# Altium PCB bms_companion-1_0.PcbDoc (part 1 of 2)
Units mm, origin at the board's own origin, x right, y up, seen from the top; angles counter-clockwise.
Board outline 368 x 57.35 mm, 4 copper layers (L1, L2, L3, L4), stack 1.586 mm thick; 222 components, 124 nets, 523 pads, 134 vias.
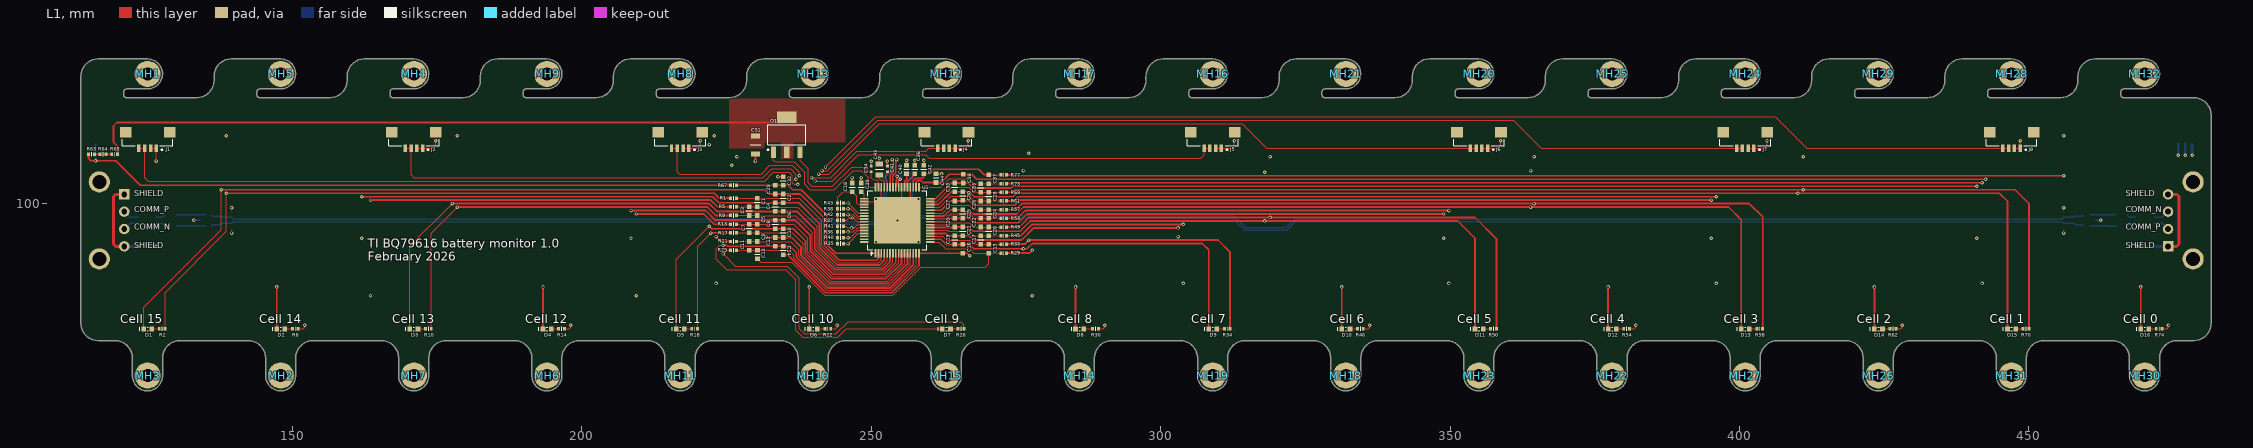
[diagram p0: L1 view]
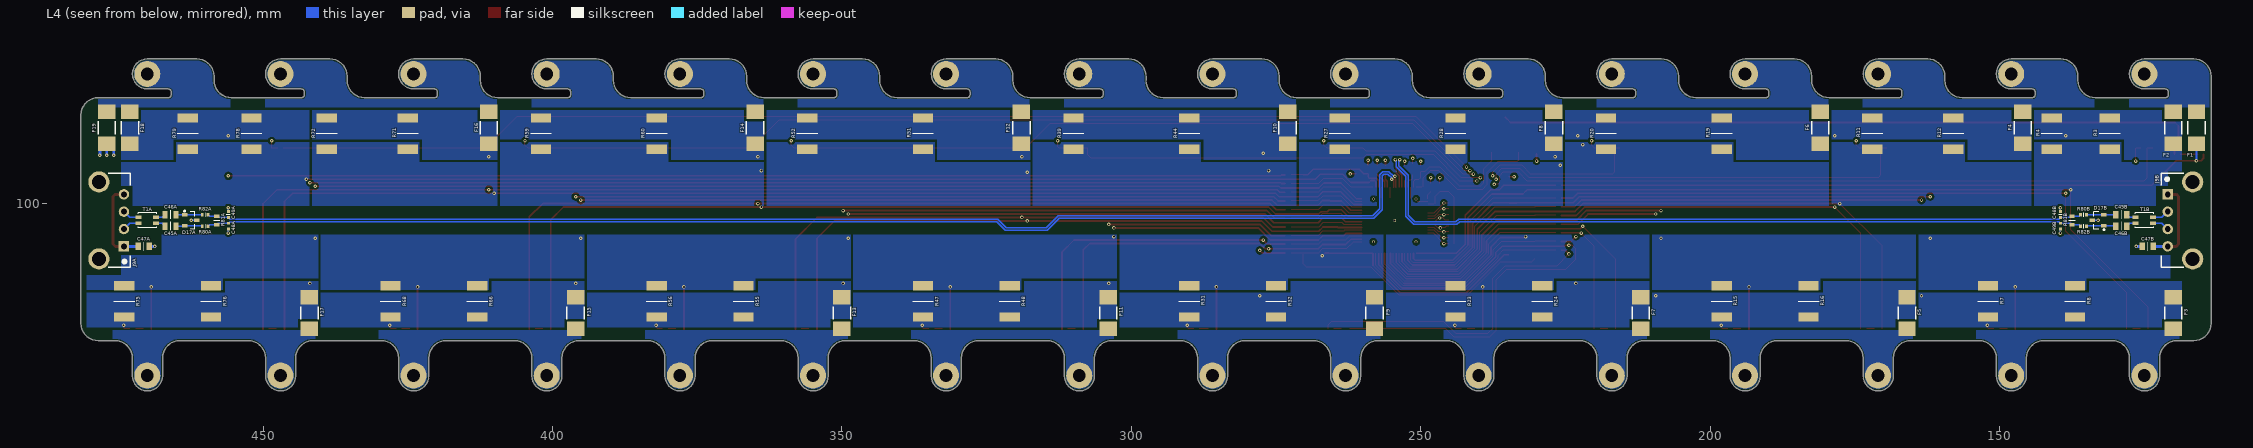
[diagram p1: L4 view, seen from below]
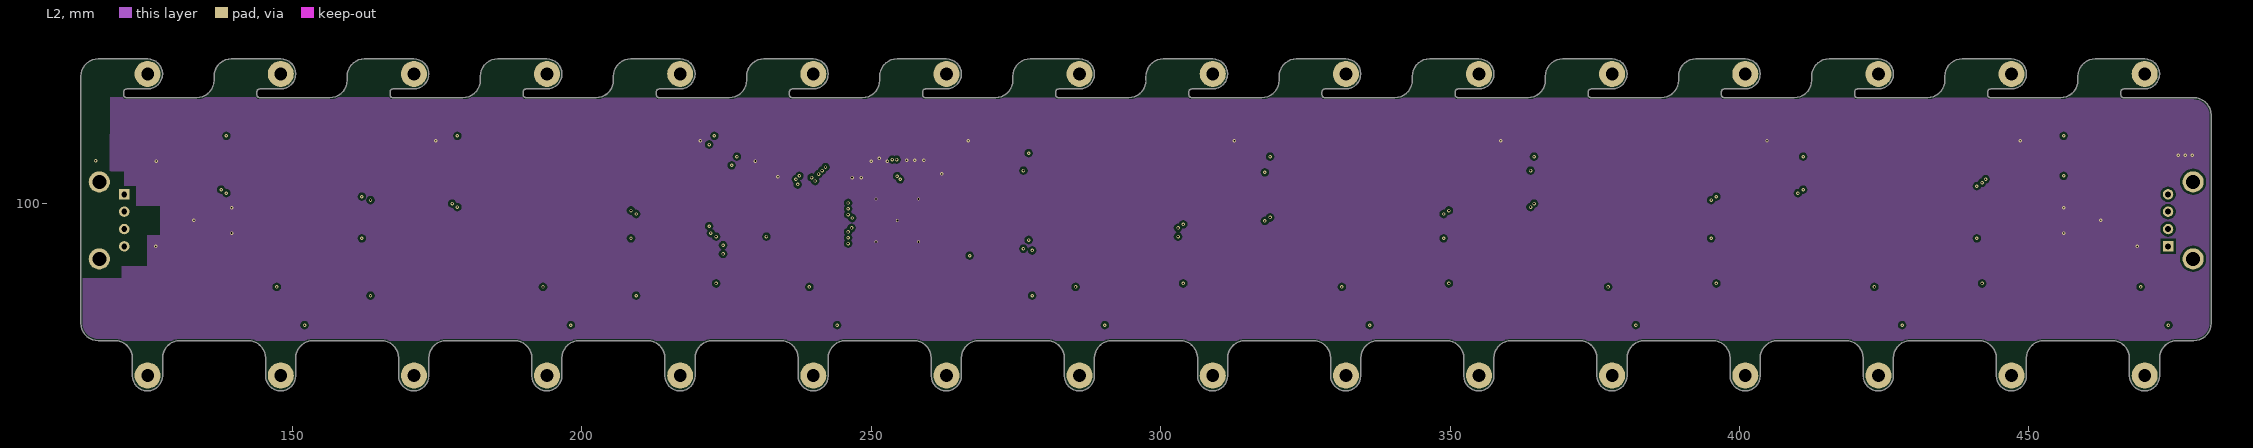
[diagram p2: L2]
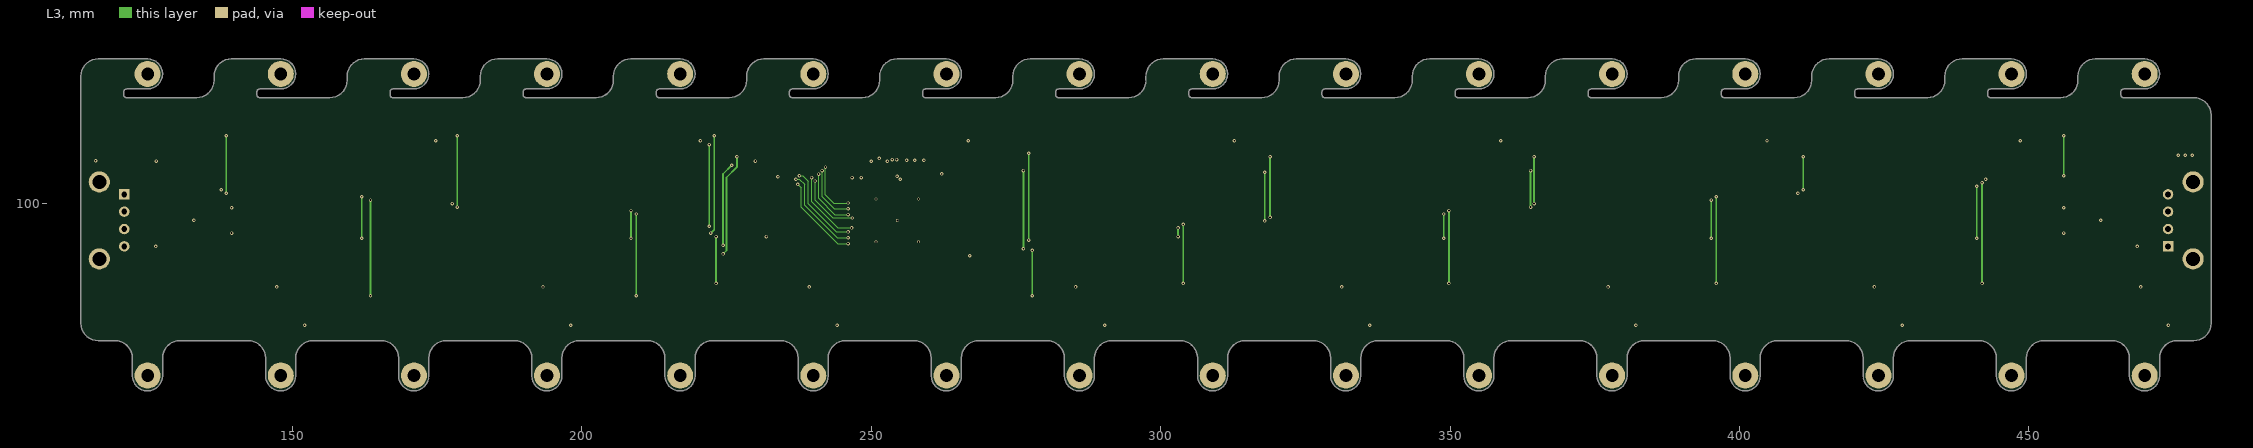
[diagram p3: L3]

## Layer stack, top to bottom
Top Solder: solder mask 0.0102, Solder Resist, Dk 3.5
L1: signal copper 0.035
D1: prepreg 0.2104, PP-006, Dk 4.1
L2: signal copper 0.0152
D2: dielectric 1.065, FR-4, Dk 4.8
L3: signal copper 0.0152
D3: prepreg 0.2104, PP-006, Dk 4.1
L4: signal copper 0.035
Bottom Solder: solder mask 0.0102, Solder Resist, Dk 3.5

## Board outline
1493 vertices, not listed, extent 113.469,67.545 481.469,124.895

## Design rules (kind name [scope] priority, off if disabled: settings)
AcuteAngle [All] p1: minimum=8.00000000000000E+0001 checktracksonly=FALSE
BoardOutlineClearance [All] p1: gap=0.3 ignorepadtopadclearanceinfootprint=FALSE except(0: Arc-SplitContinuation Track-SplitContinuation SMDPad-SplitContinuation THPad-SplitContinuation Via-SplitContinuation Fill-SplitContinuation Poly-SplitContinuation Region-SplitContinuation Text-SplitContinuation)
Clearance [All] p1: gap=0.15 ignorepadtopadclearanceinfootprint=FALSE except(0.4: Arc-Fill Arc-Poly Arc-Region Track-Fill Track-Poly Track-Region SMDPad-Fill SMDPad-Poly SMDPad-Region THPad-Fill THPad-Poly THPad-Region Via-Fill Via-Poly Via-Region Fill-Fill Fill-Poly Fill-Region Poly-Poly Poly-Region Region-Region)
DiffPairsRouting DE_100 [InDifferentialPairClass('DE_100')] p1: maxlimit=0.2 minlimit=0.2 mostfreqgap=0.2 toplayer_minwidth=0.218 toplayer_maxwidth=0.218 toplayer_prefwidth=0.218 midlayer1_minwidth=0.218 midlayer1_maxwidth=0.218 midlayer1_prefwidth=0.218 midlayer2_minwidth=0.218 midlayer2_maxwidth=0.218 midlayer2_prefwidth=0.218 bottomlayer_minwidth=0.218 bottomlayer_maxwidth=0.218 bottomlayer_prefwidth=0.218 maxuncoupledlength=12.7
HoleSize [All] p1: absolutevalues=TRUE maxlimit=64 minlimit=0.3 maxpercent=80.000 minpercent=20.000
MinimumAnnularRing [All] p1: minimumring=0.125
MinimumSolderMaskSliver [All] p1: minsoldermaskwidth=0.05
PlaneClearance [All] p1: clearance=0.4
PlaneConnect [All] p1: pad.planeconnectstyle=Relief pad.reliefexpansion=0.508 pad.reliefentries=4 pad.reliefconductorwidth=0.254 pad.reliefairgap=0.254 via.planeconnectstyle=Direct via.reliefexpansion=0.508 via.reliefentries=4 via.reliefconductorwidth=0.254 via.reliefairgap=0.254
PolygonConnect PolygonConnect_MH [HasFootprint('HOLE_M2')] p1: connectstyle=Direct reliefconductorwidth=0.254 reliefentries=4 polygonreliefangle="90 Angle" airgapwidth=0.254
PolygonConnect [All] p2: thpad.connectstyle=Relief thpad.reliefconductorwidth=0.254 thpad.reliefentries=4 thpad.polygonreliefangle="90 Angle" thpad.airgapwidth=0.254 smdpad.connectstyle=Direct smdpad.reliefconductorwidth=0.254 smdpad.reliefentries=4 smdpad.polygonreliefangle="90 Angle" smdpad.airgapwidth=0.254 via.connectstyle=Direct via.reliefconductorwidth=0.254 via.reliefentries=4 via.polygonreliefangle="90 Angle" via.airgapwidth=0.254
RoutingVias [All] p1: holewidth=0.3 width=0.6 viastyle="Through Hole" minholewidth=0.3 minwidth=0.6 maxholewidth=25 maxwidth=25 viatemplateguid#1={3B8295E5-CAAF-4C18-935D-10A9A8B2B12F} viatemplateguid#2={ACBB2F03-A6D7-4ED9-AAE5-3FD5D15C8CEC} viatemplatename#1=v50h35 viatemplatename#2=v65h30
SilkToSilkClearance [All] p1: silktosilkclearance=0.05
SilkToSolderMaskClearance [IsPad] p1: minsilkscreentomaskgap=0.005 clearancetoexposedcopper=FALSE
SolderMaskExpansion Vias [IsVia] p1: expansion=0.1 istentingtop=FALSE soldermaskfromhole=TRUE
SolderMaskExpansion [All] p2: expansion=0.102 istentingtop=FALSE
SupplyNets "Schematic Supply Nets_1" [InNet('GND')] p1: voltage=0.000
Width [All] p1: maxlimit=50 minlimit=0.15 preferedwidth=0.2
23 further rules are at their usual default settings.

## Classes and differential pairs
differential pair class DE_100: COMH. COML. COMMA COMMB
channel class comm_connector: conn_down conn_up
component class conn_up: C45B C46B C47B C48B C49B D17B J9B R80B R81B R82B T1B
component class conn_down: C45A C46A C47A C48A C49A D17A J9A R80A R81A R82A T1A
component class top: C1 C2 C3 C4 C5 C6 C7 C8 C9 C10 C11 C12 C13 C14 C15 C16 C17 C18 C19 C20 C21 C22 C23 C24 C25 C26 C27 C28 C29 C30 C31 C32 C33 C34 C35 C36 C37 C38 C39 C40 C41 C42 C43 C44 D1 D2 D3 D4 D5 D6 D7 D8 D9 D10 D11 D12 D13 D14 D15 D16 F1 F2 F3 F4 F5 F6 F7 F8 F9 F10 F11 F12 F13 F14 F15 F16 F17 F18 F19 J1 J2 J3 J4 J5 J6 J7 J8 MH1 MH2 MH3 MH4 MH5 MH6 MH7 MH8 MH9 MH10 MH11 MH12 MH13 MH14 MH15 MH16 MH17 MH18 MH19 MH20 MH21 MH22 MH23 MH24 MH25 MH26 MH27 MH28 MH29 MH30 MH31 MH32 Q1 R1 R2 R3 R4 R5 R6 R7 R8 R9 R10 R11 R12 R13 R14 R15 R16 R17 R18 R19 R20 R21 R22 R23 R24 R25 R26 R27 R28 R29 R30 R31 R32 R33 R34 R35 R36 R37 R38 R39 R40 R41 R42 R43 R44 R45 R46 R47 R48 R49 R50 R51 R52 R53 R54 R55 R56 R57 R58 R59 R60 R61 R62 R63 R64 R65 R66 R67 R68 R69 R70 R71 R72 R73 R74 R75 R76 R77 R78 R79 U1
differential pair COMMB: +COMMB_P -COMMB_N
differential pair COMMA: +COMMA_P -COMMA_N
differential pair COML.: +COML._P -COML._N
differential pair COMH.: +COMH._P -COMH._N

## Components (designator, comment, footprint, x,y, rotation, side; value= is the part's Value field where it differs from the comment)
C1 "CGJ3E3X7R1E474K080AB" C0603_0.80MM 230.3,100.1 r270 top
C2 "CGJ3E3X7R1E474K080AB" C0603_0.80MM 234.8,100.8 r270 top
C3 "CGJ3E3X7R1E474K080AB" C0603_0.80MM 228.9,98.6 r270 top
C4 "CGJ3E3X7R1E474K080AB" C0603_0.80MM 233.4,99.3 r270 top
C5 "CGJ3E3X7R1E474K080AB" C0603_0.80MM 230.3,97.1 r270 top
C6 "CGJ3E3X7R1E474K080AB" C0603_0.80MM 234.8,97.8 r270 top
C7 "CGJ3E3X7R1E474K080AB" C0603_0.80MM 228.9,95.6 r270 top
C8 "CGJ3E3X7R1E474K080AB" C0603_0.80MM 233.4,96.3 r270 top
C9 "CGJ3E3X7R1E474K080AB" C0603_0.80MM 230.3,94.1 r270 top
C10 "CGJ3E3X7R1E474K080AB" C0603_0.80MM 234.8,94.8 r270 top
C11 "CGJ3E3X7R1E474K080AB" C0603_0.80MM 228.9,92.6 r270 top
C12 "CGJ3E3X7R1E474K080AB" C0603_0.80MM 233.4,93.3 r270 top
C13 "CGJ3E3X7R1E474K080AB" C0603_0.80MM 230.35,91.1 r270 top
C14 "CGJ3E3X7R1E474K080AB" C0603_0.80MM 234.8,91.8 r270 top
C15 "CGJ3E3X7R1E474K080AB" C0603_0.80MM 270.3,92.1 r90 top
C16 "CGJ3E3X7R1E474K080AB" C0603_0.80MM 265.8,92.1 r90 top
C17 "CGJ3E3X7R1E474K080AB" C0603_0.80MM 268.9,93.6 r90 top
C18 "CGJ3E1X7R1E105K080AC" C0603_0.80MM 246.7,102.7 r90 top
C19 "CGJ3E3X7R1E474K080AB" C0603_0.80MM 264.4,93.6 r90 top
C20 "CGJ3E3X7R1E474K080AB" C0603_0.80MM 270.3,95.1 r90 top
C21 "CGJ3E3X7R1E474K080AB" C0603_0.80MM 265.8,95.1 r90 top
C22 "CGJ3E3X7R1E474K080AB" C0603_0.80MM 268.9,96.6 r90 top
C23 "CGJ3E3X7R1E474K080AB" C0603_0.80MM 264.4,96.6 r90 top
C24 "CGJ3E3X7R1E474K080AB" C0603_0.80MM 270.3,98.1 r90 top
C25 "CGJ3E3X7R1E474K080AB" C0603_0.80MM 265.8,98.1 r90 top
C26 "CGJ3E3X7R1E474K080AB" C0603_0.80MM 268.9,99.6 r90 top
C27 "CGJ3E3X7R1E474K080AB" C0603_0.80MM 264.4,99.6 r90 top
C28 "CGJ3E3X7R1E474K080AB" C0603_0.80MM 270.3,101.1 r90 top
C29 "CGJ3E3X7R1E474K080AB" C0603_0.80MM 233.4,102.3 r90 top
C30 "CGJ3E3X7R1E474K080AB" C0603_0.80MM 265.8,101.2 r90 top
C31 "CGA5H2X7R2A224M115AA" C1206_1.30MM 230,110 r270 top
C32 "CGJ3E2X7R2A103K080AA" C0603_0.80MM 234.8,103.8 r90 top
C33 "CGJ3E3X7R1E474K080AB" C0603_0.80MM 268.9,102.6 r90 top
C34 "CGA2B3X7R1H104M050BB" C0402_0.55MM 250,105.9 r90 top
C35 "CGJ3E3X7R1E474K080AB" C0603_0.80MM 264.4,102.7 r90 top
C36 "CGJ3E1X7R1E105K080AC" C0603_0.80MM 257.5,105.8 r90 top
C37 "CGJ3E3X7R1E474K080AB" C0603_0.80MM 270.3,104.1 r90 top
C38 "CGJ3E3X7R1E474K080AB" C0603_0.80MM 265.9,104.2 r90 top
C39 "CGJ3E1X7R1E105K080AC" C0603_0.80MM 248.3,102.7 r90 top
C40 "CGJ3E1X7R1E105K080AC" C0603_0.80MM 256.1,105.8 r90 top
C41 "CGA2B3X7R1H104M050BB" C0402_0.55MM 252.8,105.9 r90 top
C42 "CGJ3E3X7R1E474K080AB" C0603_0.80MM 259.1,105.8 r90 top
C43 "CGA4J3X7R1C475K125AB" C0805_1.45MM 251.4,105.8 r90 top
C44 "CGJ3E3X7R1E474K080AB" C0603_0.80MM 261.2,104.3 r90 top
C45A "CGA4J3C0G2E222J125AA" C0805_1.45MM 466,96 r0 bottom (schematic designator C45)
C45B "CGA4J3C0G2E222J125AA" C0805_1.45MM 129,98 r180 bottom (schematic designator C45)
C46A "CGA4J3C0G2E222J125AA" C0805_1.45MM 466,98 r0 bottom (schematic designator C46)
C46B "CGA4J3C0G2E222J125AA" C0805_1.45MM 129,96 r180 bottom (schematic designator C46)
C47A "CGA4J3X7R2E103K125AA" C0805_1.45MM 470.6,92.5 r180 bottom (schematic designator C47)
C47B "CGA4J3X7R2E103K125AA" C0805_1.45MM 124.4,92.5 r0 bottom (schematic designator C47)
C48A "CGA2B2C0G1H221J050BA" C0402_0.55MM 456,96 r270 bottom (schematic designator C48)
C48B "CGA2B2C0G1H221J050BA" C0402_0.55MM 139.5,98 r90 bottom (schematic designator C48)
C49A "CGA2B2C0G1H221J050BA" C0402_0.55MM 456,98 r90 bottom (schematic designator C49)
C49B "CGA2B2C0G1H221J050BA" C0402_0.55MM 139.5,96 r270 bottom (schematic designator C49)
D1 "LTST-C190KRKT" LED_0603P_RED 125,78.25 r0 top
D2 "LTST-C190KRKT" LED_0603P_RED 148,78.25 r0 top
D3 "LTST-C190KRKT" LED_0603P_RED 171,78.25 r0 top
D4 "LTST-C190KRKT" LED_0603P_RED 194,78.25 r0 top
D5 "LTST-C190KRKT" LED_0603P_RED 217,78.25 r0 top
D6 "LTST-C190KRKT" LED_0603P_RED 240,78.25 r0 top
D7 "LTST-C190KRKT" LED_0603P_RED 263,78.25 r0 top
D8 "LTST-C190KRKT" LED_0603P_RED 286,78.25 r0 top
D9 "LTST-C190KRKT" LED_0603P_RED 309,78.25 r0 top
D10 "LTST-C190KRKT" LED_0603P_RED 332,78.25 r0 top
D11 "LTST-C190KRKT" LED_0603P_RED 355,78.25 r0 top
D12 "LTST-C190KRKT" LED_0603P_RED 378,78.25 r0 top
D13 "LTST-C190KRKT" LED_0603P_RED 401,78.25 r0 top
D14 "LTST-C190KRKT" LED_0603P_RED 424,78.25 r0 top
D15 "LTST-C190KRKT" LED_0603P_RED 447,78.25 r0 top
D16 "LTST-C190KRKT" LED_0603P_RED 470,78.25 r0 top
D17A "PESD2USB3UX" 3SOT23 462.5,97 r180 bottom (schematic designator D17)
D17B "PESD2USB3UX" 3SOT23 133,97 r0 bottom (schematic designator D17)
F1 "JFC2410-0500TS" JDTFUSE_JFC2410 116,113 r270 bottom
F2 "JFC2410-0500TS" JDTFUSE_JFC2410 120,113 r270 bottom
F3 "JFC2410-0500TS" JDTFUSE_JFC2410 120,81 r90 bottom
F4 "JFC2410-0500TS" JDTFUSE_JFC2410 146,113 r270 bottom
F5 "JFC2410-0500TS" JDTFUSE_JFC2410 166,81 r90 bottom
F6 "JFC2410-0500TS" JDTFUSE_JFC2410 181,113 r270 bottom
F7 "JFC2410-0500TS" JDTFUSE_JFC2410 212,81 r90 bottom
F8 "JFC2410-0500TS" JDTFUSE_JFC2410 227,113 r270 bottom
F9 "JFC2410-0500TS" JDTFUSE_JFC2410 258,81 r90 bottom
F10 "JFC2410-0500TS" JDTFUSE_JFC2410 273,113 r270 bottom
F11 "JFC2410-0500TS" JDTFUSE_JFC2410 304,81 r90 bottom
F12 "JFC2410-0500TS" JDTFUSE_JFC2410 319,113 r270 bottom
F13 "JFC2410-0500TS" JDTFUSE_JFC2410 350,81 r90 bottom
F14 "JFC2410-0500TS" JDTFUSE_JFC2410 365,113 r270 bottom
F15 "JFC2410-0500TS" JDTFUSE_JFC2410 396,81 r90 bottom
F16 "JFC2410-0500TS" JDTFUSE_JFC2410 411,113 r270 bottom
F17 "JFC2410-0500TS" JDTFUSE_JFC2410 442,81 r90 bottom
F18 "JFC2410-0500TS" JDTFUSE_JFC2410 473,113 r270 bottom
F19 "JFC2410-0500TS" JDTFUSE_JFC2410 477,113 r270 bottom
J1 "686104148922" WURTH_WR-FPC_1.00mm_686104148922 125,112.8 r180 top locked
J2 "686104148922" WURTH_WR-FPC_1.00mm_686104148922 171,112.8 r180 top locked
J3 "686104148922" WURTH_WR-FPC_1.00mm_686104148922 217,112.8 r180 top locked
J4 "686104148922" WURTH_WR-FPC_1.00mm_686104148922 263,112.8 r180 top locked
J5 "686104148922" WURTH_WR-FPC_1.00mm_686104148922 309,112.8 r180 top locked
J6 "686104148922" WURTH_WR-FPC_1.00mm_686104148922 355,112.8 r180 top locked
J7 "686104148922" WURTH_WR-FPC_1.00mm_686104148922 401,112.8 r180 top locked
J8 "686104148922" WURTH_WR-FPC_1.00mm_686104148922 447,112.8 r180 top locked
J9A "43650-0404" MOLEX_MICROFIT_0436500404 478,97 r270 bottom locked (schematic designator J9)
J9B "43650-0404" MOLEX_MICROFIT_0436500404 117,97 r90 bottom locked (schematic designator J9)
MH1 "HOLE" HOLE_M2 125,122.3 r0 top
MH2 "HOLE" HOLE_M2 148,70.2 r0 top
MH3 "HOLE" HOLE_M2 125,70.2 r0 top
MH4 "HOLE" HOLE_M2 171,122.3 r0 top
MH5 "HOLE" HOLE_M2 148,122.3 r0 top
MH6 "HOLE" HOLE_M2 194,70.2 r0 top
MH7 "HOLE" HOLE_M2 171,70.2 r0 top
MH8 "HOLE" HOLE_M2 217,122.3 r0 top
MH9 "HOLE" HOLE_M2 194,122.3 r0 top
MH10 "HOLE" HOLE_M2 240,70.2 r0 top
MH11 "HOLE" HOLE_M2 217,70.2 r0 top
MH12 "HOLE" HOLE_M2 263,122.3 r0 top
MH13 "HOLE" HOLE_M2 240,122.3 r0 top
MH14 "HOLE" HOLE_M2 286,70.2 r0 top
MH15 "HOLE" HOLE_M2 263,70.2 r0 top
MH16 "HOLE" HOLE_M2 309,122.3 r0 top
MH17 "HOLE" HOLE_M2 286,122.3 r0 top
MH18 "HOLE" HOLE_M2 332,70.2 r0 top
MH19 "HOLE" HOLE_M2 309,70.2 r0 top
MH20 "HOLE" HOLE_M2 355,122.3 r0 top
MH21 "HOLE" HOLE_M2 332,122.3 r0 top
MH22 "HOLE" HOLE_M2 378,70.2 r0 top
MH23 "HOLE" HOLE_M2 355,70.2 r0 top
MH24 "HOLE" HOLE_M2 401,122.3 r0 top
MH25 "HOLE" HOLE_M2 378,122.3 r0 top
MH26 "HOLE" HOLE_M2 424,70.2 r0 top
MH27 "HOLE" HOLE_M2 401,70.2 r0 top
MH28 "HOLE" HOLE_M2 447,122.3 r0 top
MH29 "HOLE" HOLE_M2 424,122.3 r0 top
MH30 "HOLE" HOLE_M2 470,70.2 r0 top
MH31 "HOLE" HOLE_M2 447,70.2 r0 top
MH32 "HOLE" HOLE_M2 470,122.3 r0 top
Q1 "NSV1C201MZ4T1G" 4SOT223 235.4,111.8 r0 top
R1 "ERJ-2RKF1000X" R0402_0.40MM 226.2,100.85 r0 top
R2 "ERJ-2RKF1001X" R0402_0.40MM 127.5,78.25 r180 top
R3 "ERJ-1TNF30R0U" R2512_0.70MM 131,112 r90 bottom
R4 "ERJ-1TNF30R0U" R2512_0.70MM 141,112 r270 bottom
R5 "ERJ-2RKF1000X" R0402_0.40MM 226.2,99.35 r0 top
R6 "ERJ-2RKF1001X" R0402_0.40MM 150.5,78.25 r180 top
R7 "ERJ-1TNF30R0U" R2512_0.70MM 152,83 r270 bottom
R8 "ERJ-1TNF30R0U" R2512_0.70MM 137,83 r90 bottom
R9 "ERJ-2RKF1000X" R0402_0.40MM 226.2,97.85 r0 top
R10 "ERJ-2RKF1001X" R0402_0.40MM 173.5,78.25 r180 top
R11 "ERJ-1TNF30R0U" R2512_0.70MM 172,112 r90 bottom
R12 "ERJ-1TNF30R0U" R2512_0.70MM 158,112 r270 bottom
R13 "ERJ-2RKF1000X" R0402_0.40MM 226.2,96.35 r0 top
R14 "ERJ-2RKF1001X" R0402_0.40MM 196.5,78.25 r180 top
R15 "ERJ-1TNF30R0U" R2512_0.70MM 198,83 r270 bottom
R16 "ERJ-1TNF30R0U" R2512_0.70MM 183,83 r90 bottom
R17 "ERJ-2RKF1000X" R0402_0.40MM 226.2,94.85 r0 top
R18 "ERJ-2RKF1001X" R0402_0.40MM 219.5,78.25 r180 top
R19 "ERJ-1TNF30R0U" R2512_0.70MM 198,112 r90 bottom
R20 "ERJ-1TNF30R0U" R2512_0.70MM 218,112 r270 bottom
R21 "ERJ-2RKF1000X" R0402_0.40MM 226.2,93.35 r0 top
R22 "ERJ-2RKF1001X" R0402_0.40MM 242.5,78.25 r180 top
R23 "ERJ-1TNF30R0U" R2512_0.70MM 244,83 r270 bottom
R24 "ERJ-1TNF30R0U" R2512_0.70MM 229,83 r90 bottom
R25 "ERJ-2RKF1000X" R0402_0.40MM 226.2,91.85 r0 top
R26 "ERJ-2RKF1001X" R0402_0.40MM 265.5,78.25 r180 top
R27 "ERJ-1TNF30R0U" R2512_0.70MM 264,112 r90 bottom
R28 "ERJ-1TNF30R0U" R2512_0.70MM 244,112 r270 bottom
R29 "ERJ-2RKF1000X" R0402_0.40MM 272.9,91.35 r180 top
R30 "ERJ-2RKF1001X" R0402_0.40MM 288.75,78.25 r180 top
R31 "ERJ-1TNF30R0U" R2512_0.70MM 290,83 r270 bottom
R32 "ERJ-1TNF30R0U" R2512_0.70MM 275,83 r90 bottom
R33 "ERJ-2RKF1000X" R0402_0.40MM 272.9,92.9 r180 top
R34 "ERJ-2RKF1001X" R0402_0.40MM 311.5,78.25 r180 top
R35 "ERJ-2RKF1002X" R0402_0.40MM 244.7,93 r0 top
R36 "ERJ-2RKF1002X" R0402_0.40MM 244.7,95 r0 top
R37 "ERJ-2RKF1002X" R0402_0.40MM 244.7,97 r0 top
R38 "ERJ-2RKF1002X" R0402_0.40MM 244.7,99 r0 top
R39 "ERJ-1TNF30R0U" R2512_0.70MM 310,112 r90 bottom
R40 "ERJ-2RKF1002X" R0402_0.40MM 244.7,94 r0 top
R41 "ERJ-2RKF1002X" R0402_0.40MM 244.7,96 r0 top
R42 "ERJ-2RKF1002X" R0402_0.40MM 244.7,98 r0 top
R43 "ERJ-2RKF1002X" R0402_0.40MM 244.7,100 r0 top
R44 "ERJ-1TNF30R0U" R2512_0.70MM 290,112 r270 bottom
R45 "ERJ-2RKF1000X" R0402_0.40MM 272.9,94.35 r180 top
R46 "ERJ-2RKF1001X" R0402_0.40MM 334.5,78.25 r180 top
R47 "ERJ-1TNF30R0U" R2512_0.70MM 336,83 r270 bottom
R48 "ERJ-1TNF30R0U" R2512_0.70MM 321,83 r90 bottom
R49 "ERJ-2RKF1000X" R0402_0.40MM 272.9,95.85 r180 top
R50 "ERJ-2RKF1001X" R0402_0.40MM 357.5,78.25 r180 top
R51 "ERJ-1TNF30R0U" R2512_0.70MM 336,112 r90 bottom
R52 "ERJ-1TNF30R0U" R2512_0.70MM 356,112 r270 bottom
R53 "ERJ-2RKF1000X" R0402_0.40MM 272.9,97.35 r180 top
R54 "ERJ-2RKF1001X" R0402_0.40MM 380.5,78.25 r180 top
R55 "ERJ-1TNF30R0U" R2512_0.70MM 367,83 r270 bottom
R56 "ERJ-1TNF30R0U" R2512_0.70MM 382,83 r90 bottom
R57 "ERJ-2RKF1000X" R0402_0.40MM 272.9,98.85 r180 top
R58 "ERJ-2RKF1001X" R0402_0.40MM 403.5,78.25 r180 top
R59 "ERJ-1TNF30R0U" R2512_0.70MM 402,112 r90 bottom
R60 "ERJ-1TNF30R0U" R2512_0.70MM 382,112 r270 bottom
R61 "ERJ-2RKF1000X" R0402_0.40MM 272.9,100.35 r180 top
R62 "ERJ-2RKF1001X" R0402_0.40MM 426.5,78.25 r180 top
R63 "ERJ-2RKF1000X" R0402_0.40MM 115.3,108.4 r180 top
R64 "ERJ-2RKF1000X" R0402_0.40MM 117.3,108.4 r180 top
R65 "ERJ-2RKF1000X" R0402_0.40MM 119.3,108.4 r180 top
R66 "ERJ-1TNF30R0U" R2512_0.70MM 413,83 r270 bottom
R67 "ERJ-2RKF30R0X" R0402_0.40MM 226.2,103.05 r0 top
R68 "ERJ-1TNF30R0U" R2512_0.70MM 428,83 r90 bottom
R69 "ERJ-2RKF1000X" R0402_0.40MM 272.9,101.85 r180 top
R70 "ERJ-2RKF1001X" R0402_0.40MM 449.5,78.25 r180 top
R71 "ERJ-1TNF30R0U" R2512_0.70MM 425,112 r90 bottom
R72 "ERJ-1TNF30R0U" R2512_0.70MM 439,112 r270 bottom
R73 "ERJ-2RKF1000X" R0402_0.40MM 272.9,103.35 r180 top
R74 "ERJ-2RKF1001X" R0402_0.40MM 472.5,78.25 r180 top
R75 "ERJ-1TNF30R0U" R2512_0.70MM 474,83 r270 bottom
R76 "ERJ-1TNF30R0U" R2512_0.70MM 459,83 r90 bottom
R77 "ERJ-2RKF1000X" R0402_0.40MM 272.9,104.85 r180 top
R78 "ERJ-1TNF30R0U" R2512_0.70MM 452,112 r90 bottom
R79 "ERJ-1TNF30R0U" R2512_0.70MM 463,112 r270 bottom
R80A "ERJ-2RKF49R9X" R0402_0.40MM 460,96 r0 bottom (schematic designator R80)
R80B "ERJ-2RKF49R9X" R0402_0.40MM 135.5,98 r180 bottom (schematic designator R80)
R81A "ERJ-P03F1001V" R0603_0.55MM 458,97 r270 bottom (schematic designator R81)
R81B "ERJ-P03F1001V" R0603_0.55MM 137.5,97 r90 bottom (schematic designator R81)
R82A "ERJ-2RKF49R9X" R0402_0.40MM 460,98 r0 bottom (schematic designator R82)
R82B "ERJ-2RKF49R9X" R0402_0.40MM 135.5,96 r180 bottom (schematic designator R82)
T1A "ACT1210D-131-2P-TL00" CHOKE_ACT1210D-131-2P-TL00 470,97 r0 bottom (schematic designator T1)
T1B "ACT1210D-131-2P-TL00" CHOKE_ACT1210D-131-2P-TL00 125,97 r180 bottom (schematic designator T1)
U1 "BQ79616PAPRQ1" TI_PAP0064F 254.5,97 r90 top

## Footprints (in the part's own frame and the unit in brackets; to place one, negate y for a bottom-side part, rotate by r counter-clockwise, add the part's x,y. Pads: shape width x height; smd on the part's side, far side on the other; paste and mask are expansions set on the pad)
3SOT23 [mm] "SOT23, 3-Leads, Body 3.0x2.6mm (max), Pitch 1.01mm, IPC High Density"
  rect 0.95x0.6 smd: 1(-1.025,0.95) 2(-1.025,-0.95) 3(1.025,0)
  silkscreen extent -1.18,-1.5 0.7,1.73, body extent -1.25,-1.5 1.25,1.5, height 1.01
4SOT223 [mm] "SOT223, 4-Leads, Body 6.6x7.1mm (max), Pitch 2.30mm, IPC Medium Density"
  rect 0.9x2 smd: 1(-2.3,-3) 2(0,-3) 3(2.3,-3)
  rect 3.3x2 smd: 4(0,3)
  silkscreen extent -3.32,-2.72 3.3,1.7, body extent -3.25,-3.5 3.25,3.5, height 1.76
C0402_0.55MM [mm]
  rect 0.5x0.5 smd: 1(-0.5,0) 2(0.5,0)
  silkscreen extent -0.05,-0.36 0.05,0.36, body extent -0.5,-0.25 0.5,0.25, height 0.55
C0603_0.80MM [mm]
  rect 0.8x0.8 smd: 1(-0.75,0) 2(0.75,0)
  silkscreen extent -0.05,-0.55 0.05,0.55, body extent -0.8,-0.4 0.8,0.4, height 0.8
C0805_1.45MM [mm]
  rect 0.9x1.3 smd: 1(-0.95,0) 2(0.95,0)
  silkscreen extent -0.05,-0.79 0.05,0.79, body extent -1,-0.63 1,0.63, height 1.45
C1206_1.30MM [mm]
  rect 0.9x1.6 smd: 1(-1.55,0) 2(1.55,0)
  silkscreen extent -0.05,-0.96 0.05,0.96, body extent -1.6,-0.8 1.6,0.8, height 1.3
CHOKE_ACT1210D-131-2P-TL00 [mm]
  rect 1.05x0.6 smd: 1(-1.525,0.5) 2(-1.525,-0.5) 3(1.525,-0.5) 4(1.525,0.5)
  silkscreen extent -1.6,-1.3 1.6,1.3, body extent -1.85,-1.25 1.85,1.25, height 2.36
HOLE_M2 [mm]
  round 4.5 hole 2.2 mask+0.102: 1(0,0)
JDTFUSE_JFC2410 [mm] "JFC2410-0500TS 6.1 x 2.5 mm Fuse smd 2410"
  rect 2.5x3 smd: 1(-2.75,0) 2(2.75,0)
  silkscreen extent -1.1,-1.5 1.1,1.5, body extent -3.05,-1.25 3.05,1.25, height 2.5
LED_0603P_RED [mm]
  rect 0.8x0.85 smd: 1(-0.7,0) 2(0.7,0)
  silkscreen extent -1.4,-0.33 0.1,0.33, body extent -0.81,-0.4 0.81,0.4, height 0.6
MOLEX_MICROFIT_0436500404 [mm]
  rect 1.8x1.8 hole 1.02 paste-2539.97 mask+0: 1(4.5,3.965)
  round 1.8 hole 1.02 paste-2539.97 mask+0: 2(1.5,3.965) 3(-1.5,3.965) 4(-4.5,3.965)
  round 3.66 hole 2.41 paste-2539.97 mask+0: 5(6.65,-0.355) 6(-6.65,-0.355)
  silkscreen extent -8.1,1.22 8.1,5.08, body extent -7.83,-4.95 7.83,4.95, height 6.07
R0402_0.40MM [mm]
  rect 0.5x0.6 smd: 1(-0.5,0) 2(0.5,0)
  silkscreen extent -0.05,-0.4 0.05,0.4, body extent -0.5,-0.25 0.5,0.25, height 0.4
R0603_0.55MM [mm]
  rect 0.6x0.9 smd: 1(-0.75,0) 2(0.75,0)
  silkscreen extent -0.05,-0.59 0.05,0.59, body extent -0.77,-0.4 0.77,0.4, height 0.55
R2512_0.70MM [mm]
  rect 1.6x3.5 smd: 1(-2.7,0) 2(2.7,0)
  silkscreen extent -0.05,-1.84 0.05,1.84, body extent -3.17,-1.6 3.17,1.6, height 0.7
TI_PAP0064F [mm]
  rect 1.5x0.3 smd: 1(-5.7,3.75) 2(-5.7,3.25) 3(-5.7,2.75) 4(-5.7,2.25) 5(-5.7,1.75) 6(-5.7,1.25) 7(-5.7,0.75) 8(-5.7,0.25) 9(-5.7,-0.25) 10(-5.7,-0.75) 11(-5.7,-1.25) 12(-5.7,-1.75) 13(-5.7,-2.25) 14(-5.7,-2.75) 15(-5.7,-3.25) 16(-5.7,-3.75) 33(5.7,-3.75) 34(5.7,-3.25) 35(5.7,-2.75) 36(5.7,-2.25) 37(5.7,-1.75) 38(5.7,-1.25) 39(5.7,-0.75) 40(5.7,-0.25) 41(5.7,0.25) 42(5.7,0.75) 43(5.7,1.25) 44(5.7,1.75) 45(5.7,2.25) 46(5.7,2.75) 47(5.7,3.25) 48(5.7,3.75)
  rect 0.3x1.5 smd: 17(-3.75,-5.7) 18(-3.25,-5.7) 19(-2.75,-5.7) 20(-2.25,-5.7) 21(-1.75,-5.7) 22(-1.25,-5.7) 23(-0.75,-5.7) 24(-0.25,-5.7) 25(0.25,-5.7) 26(0.75,-5.7) 27(1.25,-5.7) 28(1.75,-5.7) 29(2.25,-5.7) 30(2.75,-5.7) 31(3.25,-5.7) 32(3.75,-5.7) 49(3.75,5.7) 50(3.25,5.7) 51(2.75,5.7) 52(2.25,5.7) 53(1.75,5.7) 54(1.25,5.7) 55(0.75,5.7) 56(0.25,5.7) 57(-0.25,5.7) 58(-0.75,5.7) 59(-1.25,5.7) 60(-1.75,5.7) 61(-2.25,5.7) 62(-2.75,5.7) 63(-3.25,5.7) 64(-3.75,5.7)
  rect 8x8 smd mask-2539.97: EP0(0,0)
  silkscreen extent -6,-5.1 5.1,5.1, body extent -6.02,-6.02 6.02,6.02, height 1.1
WURTH_WR-FPC_1.00mm_686104148922 [mm]
  rect 0.6x1.3 smd: 1(-1.5,3.35) 2(-0.5,3.35) 3(0.5,3.35) 4(1.5,3.35)
  rect 2x1.8 smd: EP0(-3.8,0.6) EP1(3.8,0.6)
  silkscreen extent -4.38,1.8 4.38,3.72, body extent -4.3,-2.9 4.3,3.6, height 2.27

## Part data
C1 C2 C3 C4 C5 C6 C7 C8 C9 C10 C11 C12 C13 C14 C15 C16 C17 C19 C20 C21 C22 C23 C24 C25 C26 C27 C28 C29 C30 C33 C35 C37 C38 C42 C44: "CAP CER 0.47UF 25V X7R 0603", Capacitance=0.47µF, Manufacturer="TDK Corporation", Operating Temperature="-55°C ~ 125°C", Package / Case="0603 (1608 Metric)", Supplier Part Number 1=445-13348-1-ND, Temperature Coefficient=X7R, Tolerance=±10%, Voltage - Rated=25V, Applications=AEC-Q200, ComponentLink1Description="Series Datasheet", ComponentLink1URL=https://product.tdk.com/info/en/catalog/datasheets/mlcc_highreliability_general_en.pdf?ref_disty=digikey, Manufacturer Part Number=CGJ3E3X7R1E474K080AB, Mounting Type="Surface Mount, MLCC", Part Status=Active, Series=CGJ, Size / Dimension="0.063\" L x 0.031\" W (1.60mm x 0.80mm)", Supplier 1=Digikey, Thickness (Max)="0.031\" (0.80mm)", Unit Price (USD)=0.33
C18 C36 C39 C40: "CAP CER 1UF 25V X7R 0603", Capacitance=1µF, Manufacturer="TDK Corporation", Operating Temperature="-55°C ~ 125°C", Package / Case="0603 (1608 Metric)", Supplier Part Number 1=445-13311-1-ND, Temperature Coefficient=X7R, Tolerance=±10%, Voltage - Rated=25V, Applications=AEC-Q200, ComponentLink1Description="Series Datasheet", ComponentLink1URL=https://product.tdk.com/info/en/catalog/datasheets/mlcc_highreliability_general_en.pdf?ref_disty=digikey, Manufacturer Part Number=CGJ3E1X7R1E105K080AC, Mounting Type="Surface Mount, MLCC", Part Status=Active, Series=CGJ, Size / Dimension="0.063\" L x 0.031\" W (1.60mm x 0.80mm)", Supplier 1=Digikey, Thickness (Max)="0.031\" (0.80mm)", Unit Price (USD)=0.55
C31: "CAP CER 0.22UF 100V X7R 1206", Capacitance=0.22µF, Manufacturer="TDK Corporation", Operating Temperature="-55°C ~ 125°C", Package / Case="1206 (3216 Metric)", Supplier Part Number 1=445-12896-1-ND, Temperature Coefficient=X7R, Tolerance=±20%, Voltage - Rated=100V, Applications=AEC-Q200, ComponentLink1Description="Series Datasheet", ComponentLink1URL=https://product.tdk.com/info/en/catalog/datasheets/mlcc_automotive_midvoltage_en.pdf?ref_disty=digikey, Manufacturer Part Number=CGA5H2X7R2A224M115AA, Mounting Type="Surface Mount, MLCC", Part Status=Active, Series=CGA, Size / Dimension="0.126\" L x 0.063\" W (3.20mm x 1.60mm)", Supplier 1=Digikey, Thickness (Max)="0.051\" (1.30mm)", Unit Price (USD)=0.3
C32: "CAP CER 10000PF 100V X7R 0603", Capacitance=10000pF, Manufacturer="TDK Corporation", Operating Temperature="-55°C ~ 125°C", Package / Case="0603 (1608 Metric)", Supplier Part Number 1=445-9137-1-ND, Temperature Coefficient=X7R, Tolerance=±10%, Voltage - Rated=100V, Applications=AEC-Q200, ComponentLink1Description="Series Datasheet", ComponentLink1URL=https://product.tdk.com/info/en/catalog/datasheets/mlcc_highreliability_midvoltage_en.pdf?ref_disty=digikey, Manufacturer Part Number=CGJ3E2X7R2A103K080AA, Mounting Type="Surface Mount, MLCC", Part Status=Active, Series=CGJ, Size / Dimension="0.063\" L x 0.031\" W (1.60mm x 0.80mm)", Supplier 1=Digikey, Thickness (Max)="0.031\" (0.80mm)", Unit Price (USD)=0.29
C34 C41: "CAP CER 0.1UF 50V X7R 0402", Capacitance=0.1µF, Manufacturer="TDK Corporation", Operating Temperature="-55°C ~ 125°C", Package / Case="0402 (1005 Metric)", Supplier Part Number 1=445-12271-1-ND, Temperature Coefficient=X7R, Tolerance=±20%, Voltage - Rated=50V, Applications=AEC-Q200, ComponentLink1Description="Series Datasheet", ComponentLink1URL=https://product.tdk.com/info/en/catalog/datasheets/mlcc_automotive_general_en.pdf?ref_disty=digikey, Manufacturer Part Number=CGA2B3X7R1H104M050BB, Mounting Type="Surface Mount, MLCC", Part Status=Active, Series=CGA, Size / Dimension="0.039\" L x 0.020\" W (1.00mm x 0.50mm)", Supplier 1=Digikey, Thickness (Max)="0.022\" (0.55mm)", Unit Price (USD)=0.17
C43: "CAP CER 4.7UF 16V X7R 0805", Capacitance=4.7µF, Manufacturer="TDK Corporation", Operating Temperature="-55°C ~ 125°C", Package / Case="0805 (2012 Metric)", Supplier Part Number 1=445-6969-1-ND, Temperature Coefficient=X7R, Tolerance=±10%, Voltage - Rated=16V, Applications=AEC-Q200, ComponentLink1Description="Series Datasheet", ComponentLink1URL=https://product.tdk.com/info/en/catalog/datasheets/mlcc_automotive_general_en.pdf?ref_disty=digikey, Manufacturer Part Number=CGA4J3X7R1C475K125AB, Mounting Type="Surface Mount, MLCC", Part Status=Active, Series=CGA, Size / Dimension="0.079\" L x 0.049\" W (2.00mm x 1.25mm)", Supplier 1=Digikey, Thickness (Max)="0.057\" (1.45mm)", Unit Price (USD)=0.37
C45A C45B C46A C46B: "CAP CER 2200PF 250V C0G 0805", Capacitance=2200pF, Manufacturer="TDK Corporation", Operating Temperature="-55°C ~ 125°C", Package / Case="0805 (2012 Metric)", Supplier Part Number 1=445-5763-1-ND, Temperature Coefficient="C0G, NP0", Tolerance=±5%, Voltage - Rated=250V, Applications=AEC-Q200, ComponentLink1Description="Series Datasheet", ComponentLink1URL=https://product.tdk.com/info/en/catalog/datasheets/mlcc_automotive_midvoltage_en.pdf?ref_disty=digikey, Manufacturer Part Number=CGA4J3C0G2E222J125AA, Mounting Type="Surface Mount, MLCC", Part Status=Active, Series=CGA, Size / Dimension="0.079\" L x 0.049\" W (2.00mm x 1.25mm)", Supplier 1=Digikey, Thickness (Max)="0.057\" (1.45mm)", Unit Price (USD)=0.27
C47A C47B: "CAP CER 10000PF 250V X7R 0805", Capacitance=10000pF, Manufacturer="TDK Corporation", Operating Temperature="-55°C ~ 125°C", Package / Case="0805 (2012 Metric)", Supplier Part Number 1=445-5834-1-ND, Temperature Coefficient=X7R, Tolerance=±10%, Voltage - Rated=250V, Applications=AEC-Q200, ComponentLink1Description="Series Datasheet", ComponentLink1URL=https://product.tdk.com/info/en/catalog/datasheets/mlcc_automotive_midvoltage_en.pdf?ref_disty=digikey, Manufacturer Part Number=CGA4J3X7R2E103K125AA, Mounting Type="Surface Mount, MLCC", Part Status=Active, Series=CGA, Size / Dimension="0.079\" L x 0.049\" W (2.00mm x 1.25mm)", Supplier 1=Digikey, Thickness (Max)="0.057\" (1.45mm)", Unit Price (USD)=0.2
C48A C48B C49A C49B: "CAP CER 220PF 50V C0G 0402", Capacitance=220pF, Manufacturer="TDK Corporation", Operating Temperature="-55°C ~ 125°C", Package / Case="0402 (1005 Metric)", Supplier Part Number 1=445-5600-1-ND, Temperature Coefficient="C0G, NP0", Tolerance=±5%, Voltage - Rated=50V, Applications=AEC-Q200, ComponentLink1Description="Series Datasheet", ComponentLink1URL=https://product.tdk.com/info/en/catalog/datasheets/mlcc_automotive_general_en.pdf?ref_disty=digikey, Manufacturer Part Number=CGA2B2C0G1H221J050BA, Mounting Type="Surface Mount, MLCC", Part Status=Active, Series=CGA, Size / Dimension="0.039\" L x 0.020\" W (1.00mm x 0.50mm)", Supplier 1=Digikey, Thickness (Max)="0.022\" (0.55mm)", Unit Price (USD)=0.1
D1 D2 D3 D4 D5 D6 D7 D8 D9 D10 D11 D12 D13 D14 D15 D16: library part LED_0603_RED_LTST-C190KRKT, "LED SUPER RED CLEAR 0603 SMD", Manufacturer="Lite-On Inc", Supplier Part Number 1=160-1436-1-ND, ComponentLink1Description=Datasheet, ComponentLink1URL=https://optoelectronics.liteon.com/upload/download/DS-22-99-0151/LTST-C190KRKT.pdf, Manufacturer Part Number=LTST-C190KRKT, Supplier 1=Digikey, Supplier 2=LCSC, Supplier Part Number 2=C94869
D17A D17B: library part TVS_PESD2USB3UX-T, "DIODE ESD USB SOT-23", Manufacturer="Nexperia USA Inc.", Supplier Part Number 1=1727-PESD2USB3UX-CT-ND, ComponentLink1Description=Datasheet, ComponentLink1URL=https://assets.nexperia.com/documents/data-sheet/PESD2USB3UX-T.pdf, Manufacturer Part Number=PESD2USB3UX, Supplier 1=Digikey, Supplier 2=LCSC, Supplier Part Number 2=C3708426
F1 F2 F3 F4 F5 F6 F7 F8 F9 F10 F11 F12 F13 F14 F15 F16 F17 F18 F19: library part FUSE_SLOW_0.5A_JFC2410-0500TS, "FUSE 0.5A 250V SMD", Current="0.5 A", Manufacturer="Shenzhen JDTfuse", Supplier Part Number 1=C136377, ComponentLink1Description=Datasheet, ComponentLink1URL=https://www.lcsc.com/datasheet/C136377.pdf, Manufacturer Part Number=JFC2410-0500TS, Supplier 1=LCSC
J1 J2 J3 J4 J5 J6 J7 J8: library part CONN_WURTH_WR-FPC_4POS_1.00mm_686104148922, "WR-FPC 1mm SMT Horiz. Bot. Contact Hinge type", Manufacturer="Wurth Elektronik", Supplier Part Number 1=732-6016-1-ND, ComponentLink1Description=Drawing, ComponentLink1URL=https://www.we-online.com/components/products/datasheet/686104148922.pdf, Manufacturer Part Number=686104148922, Supplier 1=Digikey, Supplier 2=Mouser, Supplier Part Number 2=710-686104148922
J9A J9B: library part CONN_MOLEX_MICROFIT_4POS_RA_43650-0404, "Conn Wire to Board HDR 4 POS 3mm Solder RA Thru-Hole 4 Terminal 1 Port Micro-Fit 3.0", Manufacturer=Molex, Supplier Part Number=WM1877-ND, ComponentLink1Description=Drawing, ComponentLink1URL=https://www.molex.com/content/dam/molex/molex-dot-com/products/automated/en-us/salesdrawingpdf/436/43650/436500404_sd.pdf?inline, ComponentLink2Description="Product page", ComponentLink2URL=https://www.molex.com/en-us/products/part-detail/436500404, Manufacturer Part Number=43650-0404, Supplier=Digikey
Q1: library part NPN_100V_NSV1C201MZ4T1G, "Small Signal Bipolar Transistor, 2A I(C), 100V V(BR)CEO, 1-Element, NPN, Silicon, TO-261AA", Manufacturer="ON Semiconductor", Supplier Part Number 1=NSV1C201MZ4T1GOSCT-ND, ComponentLink1Description=Datasheet, ComponentLink1URL=https://www.onsemi.com/pdf/datasheet/nss1c201mz4-d.pdf, Manufacturer Part Number=NSV1C201MZ4T1G, Supplier 1=Digikey, Supplier 2=LCSC, Supplier Part Number 2=C86644
R1 R5 R9 R13 R17 R21 R25 R29 R33 R45 R49 R53 R57 R61 R63 R64 R65 R69 R73 R77: "RES SMD 100 OHM 1% 1/10W 0402", Manufacturer="Panasonic Electronic Components", Operating Temperature="-55°C ~ 155°C", Package / Case="0402 (1005 Metric)", Power (Watts)="0.1W, 1/10W", Resistance=100, Supplier Device Package=0402, Supplier Part Number 1=P100LCT-ND, Temperature Coefficient=±100ppm/°C, Tolerance=±1%, ComponentLink1Description=Datasheet, ComponentLink1URL=https://industrial.panasonic.com/cdbs/www-data/pdf/RDA0000/AOA0000C304.pdf, Composition="Thick Film", Features="Automotive AEC-Q200", Height - Seated (Max)="0.016\" (0.40mm)", Manufacturer Part Number=ERJ-2RKF1000X, Series=ERJ, Size / Dimension="0.039\" L x 0.020\" W (1.00mm x 0.50mm)", Supplier 1=Digikey, Unit Price (USD)=0.1
R2 R6 R10 R14 R18 R22 R26 R30 R34 R46 R50 R54 R58 R62 R70 R74: "RES SMD 1K OHM 1% 1/10W 0402", Manufacturer="Panasonic Electronic Components", Operating Temperature="-55°C ~ 155°C", Package / Case="0402 (1005 Metric)", Power (Watts)="0.1W, 1/10W", Resistance=1k, Supplier Device Package=0402, Supplier Part Number 1=P1.00KLCT-ND, Temperature Coefficient=±100ppm/°C, Tolerance=±1%, ComponentLink1Description=Datasheet, ComponentLink1URL=https://industrial.panasonic.com/cdbs/www-data/pdf/RDA0000/AOA0000C304.pdf, Composition="Thick Film", Features="Automotive AEC-Q200", Height - Seated (Max)="0.016\" (0.40mm)", Manufacturer Part Number=ERJ-2RKF1001X, Series=ERJ, Size / Dimension="0.039\" L x 0.020\" W (1.00mm x 0.50mm)", Supplier 1=Digikey, Unit Price (USD)=0.1
R3 R4 R7 R8 R11 R12 R15 R16 R19 R20 R23 R24 R27 R28 R31 R32 R39 R44 R47 R48 R51 R52 R55 R56 R59 R60 R66 R68 R71 R72 R75 R76 R78 R79: "RES SMD 30 OHM 1% 1W 2512", Manufacturer="Panasonic Electronic Components", Operating Temperature="-55°C ~ 155°C", Package / Case="2512 (6432 Metric)", Power (Watts)=1W, Resistance=30, Supplier Device Package=2512, Supplier Part Number 1=PT30.0AFCT-ND, Temperature Coefficient=±100ppm/°C, Tolerance=±1%, ComponentLink1Description=Datasheet, ComponentLink1URL=https://industrial.panasonic.com/cdbs/www-data/pdf/RDA0000/AOA0000C304.pdf, Composition="Thick Film", Features="Automotive AEC-Q200", Height - Seated (Max)="0.028\" (0.70mm)", Manufacturer Part Number=ERJ-1TNF30R0U, Series=ERJ, Size / Dimension="0.252\" L x 0.126\" W (6.40mm x 3.20mm)", Supplier 1=Digikey, Unit Price (USD)=0.56
R35 R36 R37 R38 R40 R41 R42 R43: "RES SMD 10K OHM 1% 1/10W 0402", Manufacturer="Panasonic Electronic Components", Operating Temperature="-55°C ~ 155°C", Package / Case="0402 (1005 Metric)", Power (Watts)="0.1W, 1/10W", Resistance=10k, Supplier Device Package=0402, Supplier Part Number 1=P10.0KLCT-ND, Temperature Coefficient=±100ppm/°C, Tolerance=±1%, ComponentLink1Description=Datasheet, ComponentLink1URL=https://industrial.panasonic.com/cdbs/www-data/pdf/RDA0000/AOA0000C304.pdf, Composition="Thick Film", Features="Automotive AEC-Q200", Height - Seated (Max)="0.016\" (0.40mm)", Manufacturer Part Number=ERJ-2RKF1002X, Series=ERJ, Size / Dimension="0.039\" L x 0.020\" W (1.00mm x 0.50mm)", Supplier 1=Digikey, Unit Price (USD)=0.1
R67: "RES SMD 30 OHM 1% 1/10W 0402", Manufacturer="Panasonic Electronic Components", Operating Temperature="-55°C ~ 155°C", Package / Case="0402 (1005 Metric)", Power (Watts)="0.1W, 1/10W", Resistance=30, Supplier Device Package=0402, Supplier Part Number 1=P30.0LCT-ND, Temperature Coefficient=±100ppm/°C, Tolerance=±1%, ComponentLink1Description=Datasheet, ComponentLink1URL=https://industrial.panasonic.com/cdbs/www-data/pdf/RDA0000/AOA0000C304.pdf, Composition="Thick Film", Features="Automotive AEC-Q200", Height - Seated (Max)="0.016\" (0.40mm)", Manufacturer Part Number=ERJ-2RKF30R0X, Series=ERJ, Size / Dimension="0.039\" L x 0.020\" W (1.00mm x 0.50mm)", Supplier 1=Digikey, Unit Price (USD)=0.1
R80A R80B R82A R82B: "RES SMD 49.9 OHM 1% 1/10W 0402", Manufacturer="Panasonic Electronic Components", Operating Temperature="-55°C ~ 155°C", Package / Case="0402 (1005 Metric)", Power (Watts)="0.1W, 1/10W", Resistance=49.9, Supplier Device Package=0402, Supplier Part Number 1=P49.9LCT-ND, Temperature Coefficient=±100ppm/°C, Tolerance=±1%, ComponentLink1Description=Datasheet, ComponentLink1URL=https://industrial.panasonic.com/cdbs/www-data/pdf/RDA0000/AOA0000C304.pdf, Composition="Thick Film", Features="Automotive AEC-Q200", Height - Seated (Max)="0.016\" (0.40mm)", Manufacturer Part Number=ERJ-2RKF49R9X, Series=ERJ, Size / Dimension="0.039\" L x 0.020\" W (1.00mm x 0.50mm)", Supplier 1=Digikey, Unit Price (USD)=0.1
R81A R81B: "RES SMD 1K OHM 1% 1/5W 0603", Manufacturer="Panasonic Electronic Components", Operating Temperature="-55°C ~ 155°C", Package / Case="0603 (1608 Metric)", Power (Watts)="0.2W, 1/5W", Resistance=1k, Supplier Device Package=0603, Supplier Part Number 1=P16018CT-ND, Temperature Coefficient=±200ppm/°C, Tolerance=±1%, ComponentLink1Description=Datasheet, ComponentLink1URL=https://industrial.panasonic.com/cdbs/www-data/pdf/RDO0000/AOA0000C331.pdf, Composition="Thick Film", Features="Automotive AEC-Q200, Pulse Withstanding", Height - Seated (Max)="0.022\" (0.55mm)", Manufacturer Part Number=ERJ-P03F1001V, Series=ERJ, Size / Dimension="0.063\" L x 0.031\" W (1.60mm x 0.80mm)", Supplier 1=Digikey, Unit Price (USD)=0.36
T1A T1B: library part CHOKE_ACT1210D-131-2P-TL00, "130 µH @ 100 kHz 2 Line Common Mode Choke Surface Mount 6.7 kOhms @ 10 MHz 115mA DCR 3.5Ohm", Manufacturer="TDK Corporation", Supplier Part Number 1=445-ACT1210D-131-2P-TL00CT-ND, ComponentLink1Description=Datasheet, ComponentLink1URL=https://product.tdk.com/system/files/dam/doc/product/emc/emc/cmf_cmc/catalog/cmf_automotive_signal_act1210d_en.pdf, Manufacturer Part Number=ACT1210D-131-2P-TL00, Supplier 1=Digikey, Supplier 2=LCSC, Supplier Part Number 2=C5547342
U1: library part MONITOR_BQ79616PAPRQ1, "IC MONITOR BATT STACK", Manufacturer="Texas Instruments", Supplier Part Number 1=296-BQ79616PAPRQ1CT-ND, ComponentLink1Description=Datasheet, ComponentLink1URL=https://www.ti.com/lit/ds/symlink/bq79616-q1.pdf, Manufacturer Part Number=BQ79616PAPRQ1, Supplier 1=Digikey, Supplier 2=LCSC, Supplier Part Number 2=C3682338

## Via types
v1: diameter 0.6, hole 0.3, L1 to L4, 129 vias
v2: diameter 0.5, hole 0.35, L1 to L4, 5 vias

## Nets (pads, with @x,y where several pads share a name; then routed paths per layer and width w, separated by ;. In a path a pad name is that pad's centre, name@x,y a point inside that pad or via, vN(x,y) a via of type N, cw(c..) or ccw(c..) an arc to the next point about the centre after c; other vN are vias at no path point)
AVDD: C40.1 U1.38 | length 2.5
  L1 w0.218: U1.38@255.75,102.7 255.75,103.75 256.1,104.1 C40.1@256.1,105.05
BAT: C29.2 C32.1 R67.2 U1.1 | length 31.8
  L1 w0.3: R67.2@226.7,103.05 C29.2@233.4,103.05 C32.1@234.8,103.05 235.65,103.05 236.4,102.3 237.9,102.3 242.3,97.9 242.3,92.9 243.9,91.3 U1.1@250.75,91.3
CB0: C38.2 C44.1 R78.1 R79.2 U1.34 | length 186.9
  L1 w0.3: U1.34@257.75,102.7 257.75,103.65 258,103.9 258.6,103.9 258.95,103.55 C44.1@261.2,103.55 262.1,103.55 263.5,104.95 C38.2@265.9,104.95 267.35,104.95 268.2,104.1 v1(442.5,104.1)
CB1: C35.2 C38.1 D16.1 R75.1 R76.2 U1.32 | length 198.6
  L1 w0.3: U1.32@260.2,100.75 261.1,100.75 263.8,103.45 C35.2@264.4,103.45 C38.1@265.9,103.45 266.75,103.45 267.6,102.6 274.2,102.6 274.5,102.9 v1(441,102.9) ; D16.1@469.3,78.25 v1(469.3,85.5)
  L3 w0.3: v1(441,93.9) v1(441,102.9)
CB2: C30.2 C35.1 D15.1 R71.1 R72.2 U1.30 | length 210.2
  L1 w0.3: U1.30@260.2,99.75 261.6,99.75 263.8,101.95 C35.1@264.4,101.95 C30.2@265.8,101.95 266.916,101.95 267.766,101.1 274.5,101.1 275.1,101.7 v1(410.1,101.7) 444.9,101.7 446.3,100.3 D15.1@446.3,78.25
CB3: C27.2 C30.1 D14.1 R66.1 R68.2 U1.28 | length 150.2
  L1 w0.3: U1.28@260.2,98.75 262.1,98.75 263.7,100.35 C27.2@264.4,100.35 265.7,100.35 C30.1@265.8,100.45 266.912,100.45 267.762,99.6 274.8,99.6 275.7,100.5 v1(395.1,100.5) ; D14.1@423.3,78.25 v1(423.3,85.5)
  L3 w0.3: v1(395.1,93.9) v1(395.1,100.5)
CB4: C25.2 C27.1 D13.1 R59.1 R60.2 U1.26 | length 167.4
  L1 w0.3: U1.26@260.2,97.75 262.6,97.75 263.7,98.85 C27.1@264.4,98.85 C25.2@265.8,98.85 266.15,98.5 267.216,98.5 267.616,98.1 275.1,98.1 276.3,99.3 v1(363.9,99.3) 398.1,99.3 400.3,97.1 D13.1@400.3,78.25
  L3 w0.3: v1(363.9,99.3) v1(363.9,105.6)
CB5: C23.2 C25.1 D12.1 R55.1 R56.2 U1.24 | length 101.3
  L1 w0.3: U1.24@260.2,96.75 263,96.75 263.6,97.35 C23.2@264.4,97.35 C25.1@265.8,97.35 266.984,97.35 267.734,96.6 275.4,96.6 276.9,98.1 v1(348.9,98.1) ; D12.1@377.3,78.25 v1(377.3,85.5)
  L3 w0.3: v1(348.9,93.9) v1(348.9,98.1)
CB6: C21.2 C23.1 D11.1 R51.1 R52.2 U1.22 | length 120.5
  L1 w0.3: U1.22@260.2,95.75 264.3,95.75 C23.1@264.4,95.85 C21.2@265.8,95.85 266.896,95.85 267.646,95.1 275.7,95.1 277.5,96.9 v1(318,96.9) 351.3,96.9 354.3,93.9 D11.1@354.3,78.25
  L3 w0.3: v1(318,96.9) v1(318,105.3)
CB7: C19.2 C21.1 D10.1 R47.1 R48.2 U1.20 | length 52.9
  L1 w0.3: U1.20@260.2,94.75 262.9,94.75 263.3,94.35 C19.2@264.4,94.35 C21.1@265.8,94.35 266.93,94.35 267.68,93.6 276,93.6 278.1,95.7 v1(303,95.7) ; D10.1@331.3,78.25 v1(331.3,85.5)
  L3 w0.3: v1(303,94.2) v1(303,95.7)
CB8: C16.2 C19.1 D9.1 R39.1 R44.2 U1.18 | length 76.8
  L1 w0.3: U1.18@260.2,93.75 262.05,93.75 262.95,92.85 C19.1@264.4,92.85 C16.2@265.8,92.85 266.964,92.85 267.714,92.1 v1(276.3,92.1) 276.9,92.1 277.8,93 307.2,93 308.3,91.9 D9.1@308.3,78.25
  L3 w0.3: v1(276.3,92.1) v1(276.3,105.6)
CB9: C14.2 C16.1 D8.1 R31.1 R32.2 U1.16 | length 46.4
  L1 w0.3: C14.2@234.8,91.05 235.594,91.05 242.144,84.5 253.557,84.5 258.25,89.193 U1.16@258.25,91.3 265.75,91.3 C16.1@265.8,91.35 266.55,91.35 v1(267,90.9) ; D8.1@285.3,78.25 v1(285.3,85.5)
CB10: C12.2 C14.1 D7.1 R27.1 R28.2 U1.14 | length 108
  L1 w0.2: v1(224.4,92.7) 223.8,92.7 223.2,92.1 223.2,90.3 225,88.5 235.2,88.5 237,86.7 237,78 238.2,76.8 244.2,76.8 245.65,78.25 D7.1@262.3,78.25
  L1 w0.3: v1(224.4,92.7) 225,92.7 225.15,92.55 C12.2@233.4,92.55 C14.1@234.8,92.55 235.95,92.55 237.05,91.45 237.05,90.725 242.475,85.3 253.225,85.3 257.25,89.325 U1.14@257.25,91.3
  L3 w0.3: v1(224.4,92.7) 224.4,105 v1(225.9,106.5)